# EAGLE board HV Board rev11 (EAGLE 9.2.2)
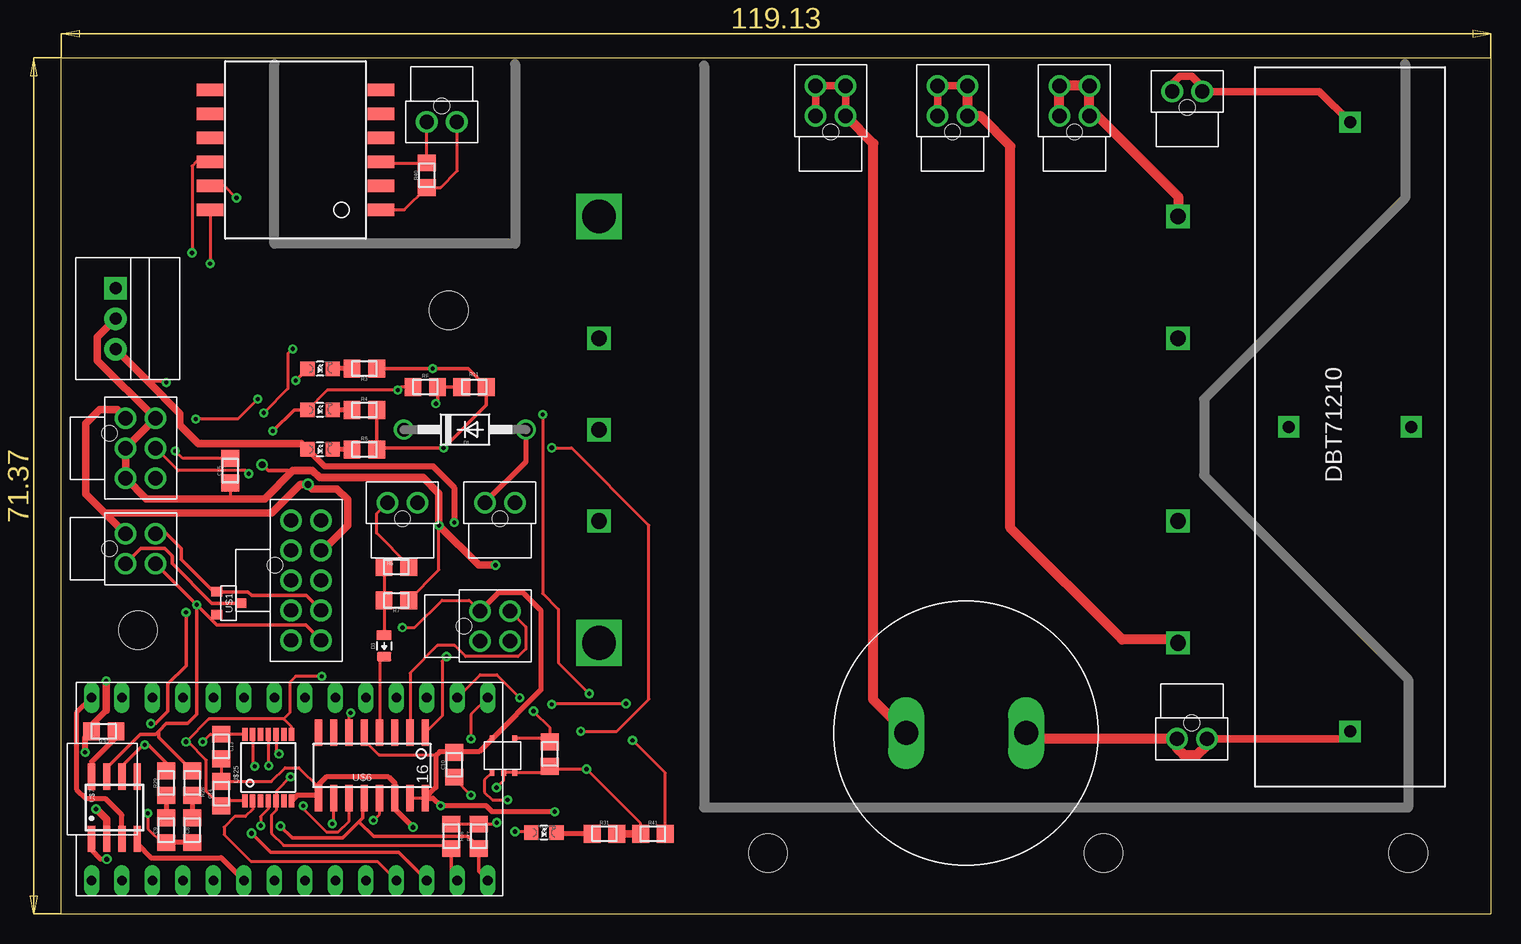
[diagram p0: board, top side]
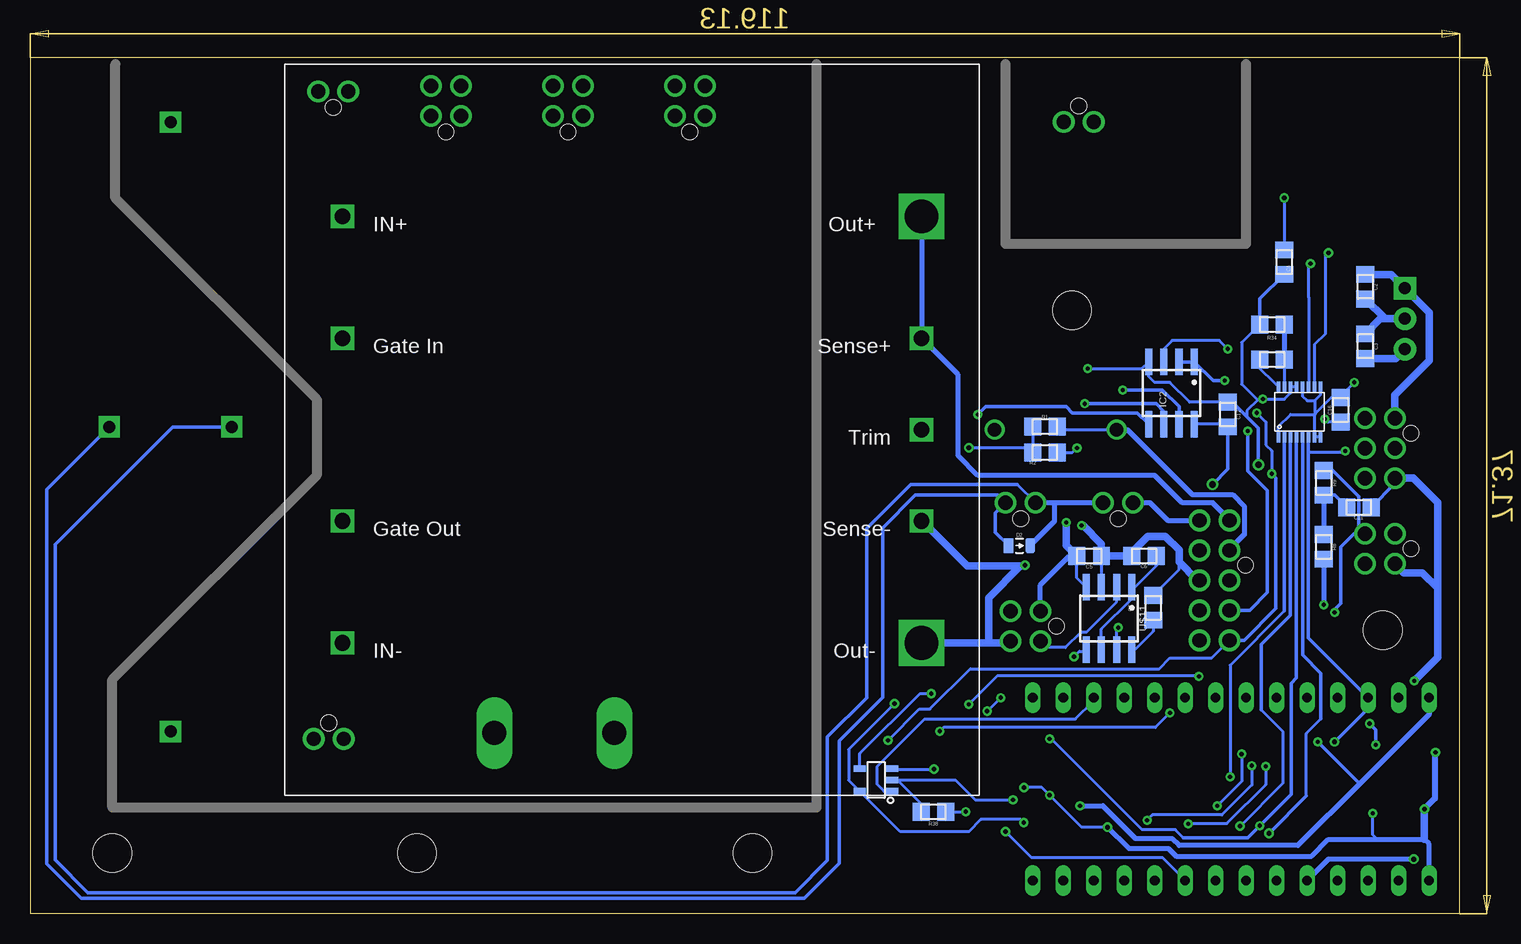
[diagram p1: board, bottom side, seen from below]

Size 119.13 x 71.37 mm. Coordinates in mm from the lower left corner, seen from the top.
Outline: 0,0 119.13,0 119.13,71.37 0,71.37 0,0
Copper layers (1*16): Top 0.035mm / dielectric 1.5mm / Bottom 0.035mm
Design rules "DRC Advanced Circuits": minimum track width 6mil, minimum drill 10mil, track to track 6mil, track to pad 6mil, pad to pad 6mil, via to via 6mil, smd to smd 6mil, copper to edge 40mil, drill to drill 6mil, minimum pad ring 10mil, minimum via ring 8mil, stop-mask expansion 4mil, vias tented up to drill 0mil, thermal gap 10mil
Net classes: 1 TS: clearance 8.5 mm to class 0; 2 ISO_SPI: clearance 8.5 mm to class 0, clearance 8.5 mm to class 1
Holes 3.2 mm at 86.87,5.08 6.4,23.67 112.27,5.08 58.93,5.08 32.31,50.34
tKeepout: area 29.3,47.3 to 35.3,53.3; area 3.4,20.7 to 9.4,26.7; area 55.9,2.1 to 61.9,8.1; area 83.9,2.1 to 89.9,8.1; area 109.3,2.1 to 115.3,8.1
bKeepout: area 109.3,2.1 to 115.3,8.1; area 83.9,2.1 to 89.9,8.1; area 55.9,2.1 to 61.9,8.1; area 3.4,20.7 to 9.4,26.7; area 29.3,47.3 to 35.3,53.3

## Footprints (pad centres in the part's own frame; a part is rotated, then mirrored left to right if it is on the bottom)
LED-805 = smd 1.2 x 1.2: A 0,-1.05; C 0,1.05
LLS2V221MELZ = drill 2 long: P$1 -5,0; P$2 5,0
0805 = smd 1.4 x 1.5: 1 -1.025,0; 2 1.025,0
NANO-FIT_VERTICAL-4 = drill 1.2: P$1 -1.25,0; P$2 1.25,0; P$3 -1.25,2.5; P$4 1.25,2.5 | hole 1.3: 0,-1.34
DO-41 = drill 1.118: A 5.08,0; C -5.08,0
0805_D = smd 0.8 x 1.2: A -0.9,0; C 0.9,0
NANO-FIT_VERTICAL-2 = drill 1.2: P$1 -1.25,0; P$2 1.25,0 | hole 1.3: 0,-1.34
OKI-78SR = drill 1 pad 1.88 square: 1 -2.54,0 | drill 1 pad 1.88: 2 0,0; 3 2.54,0
SOIC-08 = smd 0.6 x 2.2: 1 -1.905,-2.6; 2 -0.635,-2.6; 3 0.635,-2.6; 4 1.905,-2.6; 5 1.905,2.6; 6 0.635,2.6; 7 -0.635,2.6; 8 -1.905,2.6
NANO-FIT_VERTICAL-6 = drill 1.2: P$1 -2.5,0; P$2 0,0; P$3 2.5,0; P$4 -2.5,2.5; P$5 0,2.5; P$6 2.5,2.5 | hole 1.3: -1.25,-1.34
NANO-FIT_VERTICAL-10 = drill 1.2: P$1 -5,0; P$2 -2.5,0; P$3 0,0; P$4 2.5,0; P$5 5,0; P$6 -5,2.5; P$7 -2.5,2.5; P$8 0,2.5; P$9 2.5,2.5; P$10 5,2.5 | hole 1.3: -1.27,-1.34
SOT23 = smd 0.8 x 0.9: 1 -0.95,-1; 2 0.95,-1; 3 0,1
HM2102NLT = smd 1.067 x 2.184: P$1 0,0; P$2 2,0; P$3 4,0; P$4 6,0; P$5 8,0; P$6 10,0; P$7 10,14.25; P$8 8,14.25; P$9 6,14.25; P$10 4,14.25; P$11 2,14.25; P$12 0,14.25
SOT-23-5 = smd 1 x 0.55: 1 -1.35,0.95; 2 -1.35,0; 3 -1.35,-0.95; 4 1.35,-0.95; 5 1.35,0.95
DBT71210 = drill 1 pad 1.778 square: COIL+ 30,-13; COIL- 30,-2.8; CONTACT1 55.4,-7.9; CONTACT2 4.6,-7.9
HV_DCDC_VI-J71-CZ = drill 1.3 square: 1VIN+ 5.08,-12.7; 2GATEIN 5.08,-22.86; 3GATEOUT 5.08,-38.1; 4VIN- 5.08,-48.26; 6SENSE+ 53.34,-22.86; 7TRIM 53.34,-30.48; 8SENSE- 53.34,-38.1 | drill 2.8 square: 5VOUT+ 53.34,-12.7; 9VOUT- 53.34,-48.26
SOIC-16 = smd 0.6 x 2.2: 1 -4.445,-2.794; 2 -3.175,-2.794; 3 -1.905,-2.794; 4 -0.635,-2.794; 5 0.635,-2.794; 6 1.905,-2.794; 7 3.175,-2.794; 8 4.445,-2.794; 9 4.445,2.667; 10 3.175,2.667; 11 1.905,2.667; 12 0.635,2.667; 13 -0.635,2.667; 14 -1.905,2.667; 15 -3.175,2.667; 16 -4.445,2.667
MSOP-16 = smd 0.305 x 0.889: 1 -0.1,-0.5; 2 0.4,-0.5; 3 0.9,-0.5; 4 1.4,-0.5; 5 1.9,-0.5; 6 2.4,-0.5; 7 2.9,-0.5; 8 3.4,-0.5; 9 3.4,3.7; 10 2.9,3.7; 11 2.4,3.7; 12 1.9,3.7; 13 1.4,3.7; 14 0.9,3.7; 15 0.4,3.7; 16 -0.1,3.7
TEENSY_3.2_SIMPLE = drill 0.8 long: 3.3V 16.51,29.21; A0 16.51,3.81; A1 16.51,6.35; A2 16.51,8.89; A3 16.51,11.43; A4 16.51,13.97; A5 16.51,16.51; A6 16.51,19.05; A7 16.51,21.59; A8 16.51,24.13; A9 16.51,26.67; AGND 16.51,31.75; D0(RX1) 1.27,31.75; D1(TX1) 1.27,29.21; D2 1.27,26.67; D3(CANTX) 1.27,24.13; D4(CANRX) 1.27,21.59; D5 1.27,19.05; D6 1.27,16.51; D7(RX3) 1.27,13.97; D8(TX3) 1.27,11.43; D9(RX2) 1.27,8.89; D10(TX2) 1.27,6.35; D11 1.27,3.81; D12 1.27,1.27; D13 16.51,1.27; GND 1.27,34.29; VIN 16.51,34.29
SOT23-5 = smd 0.61 x 0.406: EN -2.794,0; GND -2.794,0.94; VCC 0,1.905; WDI 0,0; WDO -2.794,1.905
TSSOP-14 = smd 0.45 x 1.1: 1 -1.958,-2.618; 2 -1.308,-2.618; 3 -0.657,-2.618; 4 -0.007,-2.618; 5 0.642,-2.618; 6 1.292,-2.618; 7 1.942,-2.618; 8 1.942,2.918; 9 1.292,2.918; 10 0.642,2.918; 11 -0.007,2.918; 12 -0.657,2.918; 13 -1.308,2.918; 14 -1.958,2.918

## Placement (x,y rotation side)
BMS-OK  GREEN  [LED-805]  21.59,42.04 270 top
C1  180µF  [LLS2V221MELZ]  75.43,15.1 180 top
C2  10uF  [0805]  7.85,52.3 270 bottom
C3  10uF  [0805]  7.85,47.35 90 bottom
C4  27pF  [0805]  14.61,54.36 270 bottom
C5  0.1uF  [0805]  30.86,29.84 0 bottom
C6  0.1uF  [0805]  26.29,29.84 180 bottom
C7  530pF  [0805]  25.53,25.53 90 bottom
C8  560pF  [0805]  10.92,6.99 90 top
C9  560pF  [0805]  8.76,6.99 90 top
C10  0.1uF  [0805]  32.77,12.45 270 top
C11  4.7nF  [0805]  8.38,33.91 180 bottom
C12  0.1uF  [0805]  19.3,41.66 90 bottom
C13  0.1uF  [0805]  13.34,13.97 270 top
C14  0.1uF  [0805]  13.34,10.03 90 top
C15  0.1uF  [0805]  14.1,36.96 90 top
C16  0.1uF  [0805]  9.91,42.04 90 bottom
CURRENT  CURRENT  [NANO-FIT_VERTICAL-4]  34.92,24 270 top
D1  DIODE  [DO-41]  33.66,40.39 0 top
D2  TS4148 RYG  [0805_D]  36.68,30.71 0 bottom
D3  TS4148 RYG  [0805_D]  26.92,22.35 270 top
DISCH+  DISCHARGE+  [NANO-FIT_VERTICAL-2]  93.85,68.58 0 top
HV+FUSED_1A-IMD+  HV+  [NANO-FIT_VERTICAL-4]  84.45,66.55 0 top
HV+UNFUSED  HV+UNFUSED  [NANO-FIT_VERTICAL-2]  94.23,14.61 180 top
HV-FUSED_1A-IMD-  HV-  [NANO-FIT_VERTICAL-4]  74.3,66.55 0 top
HV-UNFUSED_DISCHARGE-  HV-UNFUSED  [NANO-FIT_VERTICAL-4]  64.14,66.55 0 top
IC1  OKI-78SR-5  [OKI-78SR]  4.55,49.63 270 top
IC2  NE5532SOIC  [SOIC-08]  24,43.43 180 bottom
IMD  CONNECTOR-6NANO-FIT_VERTICAL-6  [NANO-FIT_VERTICAL-6]  5.38,38.84 270 top
IMD-OK  YELLOW  [LED-805]  21.59,45.47 270 top
INTERLOCK  INTERLOCK  [NANO-FIT_VERTICAL-2]  28.45,34.29 0 top
ISO_SPI  ISO_SPI  [NANO-FIT_VERTICAL-2]  31.73,66.04 180 top
LED  BLUE  [LED-805]  40.23,6.78 270 top
MAIN  MAIN  [NANO-FIT_VERTICAL-10]  19.18,27.81 270 top
ON-LED  PURPLE  [LED-805]  21.59,38.73 270 top
POWER  POWER  [NANO-FIT_VERTICAL-4]  5.38,30.45 270 top
R1  43k  [0805]  34.54,40.64 180 bottom
R2  12k  [0805]  34.54,38.48 180 bottom
R3  820  [0805]  25.27,45.47 180 top
R4  2k  [0805]  25.27,42.04 0 top
R5  270  [0805]  25.27,38.73 0 top
R6  43k  [0805]  27.94,28.96 180 top
R7  12k  [0805]  27.94,26.16 180 top
R8  60  [0805]  11.3,30.61 270 bottom
R9  60  [0805]  11.3,35.94 90 bottom
R11  1k  [0805]  34.42,43.94 180 top
R28  100  [0805]  10.92,10.92 90 top
R29  100  [0805]  8.76,10.92 90 top
R30  1k  [0805]  3.56,15.24 0 top
R31  43  [0805]  45.29,6.71 0 top
R33  1k  [0805]  15.62,46.23 0 bottom
R34  1k  [0805]  15.62,49.15 180 bottom
R36  2k  [0805]  32.51,6.48 270 top
R37  2k  [0805]  34.8,6.48 270 top
R38  430  [0805]  43.84,8.51 180 bottom
R40  100  [0805]  30.48,61.59 90 top
R41  2k  [0805]  49.33,6.68 180 top
R42  10k  [0805]  40.74,13.34 270 top
RELAYS  RELAYS  [NANO-FIT_VERTICAL-2]  36.58,34.29 0 top
RF  2k  [0805]  30.35,43.94 180 top
U$1  CDSOT23-T24CAN-Q  [SOT23]  13.97,25.91 270 top
U$2  HM2102NLT  [HM2102NLT]  26.67,58.71 90 top
U$3  SN74LVC1G08  [SOT-23-5]  48.62,11.18 180 bottom
U$4  [DBT71210]  115.32,70.61 270 top
U$5  HV_DCDC_VI-J71-CZ  [HV_DCDC_VI-J71-CZ]  98.17,70.87 0 bottom
U$6  MCP3208SOIC  [SOIC-16]  25.91,12.32 180 top
U$7  MCP2551  [SOIC-08]  4.45,8.86 0 top
U$8  LTC6820  [MSOP-16]  14.99,40.26 0 bottom
U$9  TEENSY_3.2_SIMPLE  [TEENSY_3.2_SIMPLE]  36.83,1.52 90 top
U$10  STWD100  [SOT23-5]  37.82,14.61 90 top
U$11  MAX7480  [SOIC-08]  29.21,24.64 180 bottom
U$25  TXB0104TSSOP  [TSSOP-14]  17.27,12.06 0 top

## Library data of the parts
BMS-OK C1-C16 CURRENT D1-D3 DISCH+ HV+FUSED_1A-IMD+ HV+UNFUSED HV-FUSED_1A-IMD- HV-UNFUSED_DISCHARGE- IC1 IC2 IMD IMD-OK INTERLOCK ISO_SPI LED MAIN ON-LED POWER R1-R9 R11 R28-R31 R33 R34 R36-R38 R40-R42 RELAYS RF U$1-U$11 U$25 = HyTechDevices

## Nets
+3V3: C14.1 C15.2 R36.1 R37.1 U$3.5 U$8.6 U$9.3.3V U$25.1 U$25.8
+5V: C3.1 C5.1 C10.1 C13.1 C16.2 CURRENT.P$1 IC1.3 ON-LED.A R38.1 U$6.5 U$6.15 U$6.16 U$7.3 U$8.1 U$8.7 U$8.8 U$8.9 U$8.12 U$9.VIN U$10.VCC U$11.4 U$11.7 U$25.14
+12V: C2.1 C12.1 IC1.1 IC2.8 IMD.P$1 MAIN.P$7 POWER.P$1
BMS_OK_3.3V: IC2.5 U$3.4
BMS_OK_10V: BMS-OK.A IC2.7 MAIN.P$4 RF.2
CANH: MAIN.P$10 POWER.P$4 R8.2 R28.2 U$1.2 U$7.7
CANL: MAIN.P$9 POWER.P$3 R9.2 R29.2 U$1.1 U$7.6
CHARGE_ENABLE: D1.C MAIN.P$2 R1.1
CS_LTC6820: U$8.5 U$9.D10(TX2)
CS_MCP3208_3.3V: U$9.D9(RX2) U$25.2
CUR_SENSE: CURRENT.P$2 U$11.2
DISCHARGE_RELAY_GND: D2.A RELAYS.P$2 U$4.COIL-
GND: C2.2 C3.2 C4.2 C5.2 C6.2 C7.2 C8.1 C9.1 C10.2 C11.1 C12.2 C13.2 C14.2 C15.1 C16.1 CURRENT.P$4 IC1.2 IC2.4 IMD.P$2 IMD.P$3 IMD.P$4 MAIN.P$8 POWER.P$2 R2.1 R3.1 R4.2 R5.2 R7.1 R11.1 R30.1 R31.2 R34.2 R41.2 R42.2 U$1.3 U$3.3 U$5.8SENSE- U$5.9VOUT- U$6.9 U$6.14 U$7.2 U$8.13 U$8.14 U$9.GND U$10.EN U$10.GND U$11.3 U$25.7
HV+FUSED_1A [TS]: HV+FUSED_1A-IMD+.P$1 HV+FUSED_1A-IMD+.P$2 HV+FUSED_1A-IMD+.P$3 HV+FUSED_1A-IMD+.P$4 U$5.1VIN+
HV+UNFUSED [TS]: C1.P$1 HV+UNFUSED.P$1 HV+UNFUSED.P$2 U$4.CONTACT1
HV+UNFUSED_FSAE_DISCHARGE [TS]: DISCH+.P$1 DISCH+.P$2 U$4.CONTACT2
HV-FUSED_1A [TS]: HV-FUSED_1A-IMD-.P$1 HV-FUSED_1A-IMD-.P$2 HV-FUSED_1A-IMD-.P$3 HV-FUSED_1A-IMD-.P$4 U$5.4VIN-
HV-UNFUSED [TS]: C1.P$2 HV-UNFUSED_DISCHARGE-.P$1 HV-UNFUSED_DISCHARGE-.P$2 HV-UNFUSED_DISCHARGE-.P$3 HV-UNFUSED_DISCHARGE-.P$4
IM: U$2.P$10 U$8.10
IP: U$2.P$12 U$8.11
ISOSPI-M [ISO_SPI]: ISO_SPI.P$2 R40.2 U$2.P$3
ISOSPI-P [ISO_SPI]: ISO_SPI.P$1 R40.1 U$2.P$1
MISO: R37.2 U$6.12 U$8.3 U$9.D12
MOSI_5V: U$6.11 U$25.10
MOSI_TEENSY: R36.2 U$8.2 U$9.D11 U$25.5
N$1: U$6.1 U$11.5
N$2: C6.1 U$11.1 U$11.6
N$3: ON-LED.C R5.1
N$4: C7.1 U$11.8
N$7: U$6.10 U$25.13
N$9: D3.A R6.2 R7.2
N$10: D3.C U$6.4
N$11: C11.2 R8.1 R9.1
N$12: IC2.6 R11.2 RF.1
N$24: R1.2 R2.2 U$6.6
N$25: U$7.1 U$9.D3(CANTX)
N$26: R30.2 U$7.8
N$27: C8.2 R28.1
N$28: C9.2 R29.1
N$29: LED.C R31.1
N$31: R33.1 U$8.16
N$32: R33.2 R34.1 U$8.15
N$35: C4.1 U$2.P$11
N$36: U$7.4 U$9.D4(CANRX)
N$37: LED.A U$9.D7(RX3)
N$38: R38.2 U$3.2 U$10.WDO
N$40: U$3.1 U$9.A1
N$42: IC2.1 IC2.2 IMD-OK.A
N$44: BMS-OK.C R4.1
N$45: IMD-OK.C R3.2
N$50: R42.1 U$9.A0 U$10.WDI
OKHS: IC2.3 IMD.P$5 MAIN.P$5 R41.1
SCK_5V: U$6.13 U$25.11
SCK_TEENSY: U$8.4 U$9.D13 U$25.4
SHUTDOWN_G: INTERLOCK.P$1 MAIN.P$6 R6.1
SHUTDOWN_H: D1.A D2.C INTERLOCK.P$2 RELAYS.P$1 U$4.COIL+
TEMP_SENSE: CURRENT.P$3 U$6.2
TSAL+: MAIN.P$1 U$5.5VOUT+ U$5.6SENSE+

## Tracks (layer width: path | path; a pad name or v marks a point on that pad's centre or on a via)
+3V3  (via drill 0.35, 0.38)
  Top 0.254: v47.09,17.53 40.95,17.53 v40.89,17.48 | U$25.8 19.21,15.58 18.54,16.26 | 18.54,16.26 12.32,16.26 v10.41,14.35 10.59,14.35 12.11,12.83 12.11,10.23 C14.1 13.77,9.45 U$25.1 | v21.72,19.81 19.56,19.81 19.05,19.3 19.05,16.76 18.54,16.26 | C15.2 10.15,37.98 v9.53,38.61 | R36.1 R37.1 36.2,7.5 v36.32,7.62
  Bottom 0.254: v47.09,17.53 50.9,13.72 50.9,11.16 U$3.5 46.6,6.86 40.89,6.86 39.88,7.87 36.58,7.87 v36.32,7.62 | v40.89,17.48 38.49,19.88 21.78,19.88 v21.72,19.81 | v9.53,38.61 9.65,38.48 12.59,38.48
  Bottom 0.305: v10.41,14.35 7.62,17.14 U$9.3.3V 12.59,23 12.59,38.48 U$8.6
+5V  (via drill 0.35)
  Top 0.254: U$25.14 15.3,14.99 C13.1 12.46,14.99 v11.81,14.35 | C10.1 32.2,13.47 32.13,13.54 | U$6.5 25.27,14.48 26.48,13.27 31.18,13.27 31.23,13.22 31.24,13.21 31.24,13.11 | U$6.16 U$6.15 | 7.21,44.42 8.66,44.42 v8.76,44.32 | v28.45,23.88 29.46,23.88 31.75,26.16 34.02,26.16 CURRENT.P$1
  Top 0.406: U$7.3 5.08,8.26 3.74,9.59 2.09,9.59 1.27,10.41 1.27,16.76 U$9.VIN | 31.24,13.11 31.24,10.54 U$6.16 31,9.65 v31.63,9.02 35.43,9.02 35.92,8.53 v41.15,8.53 | 31.23,13.22 31.55,13.54 32.13,13.54 34.85,13.54 U$10.VCC 39.98,18.67 39.98,25.3 38.48,26.8 36.47,26.8 CURRENT.P$1
  Top 0.508: ON-LED.A 21.94,37.34 30.99,37.34 32.77,35.56 v32.77,32.64
  Top 0.61: IC1.3 7.21,44.42 9.91,41.73 9.91,40.77 11.43,39.24 20.03,39.24 ON-LED.A
  Bottom 0.254: U$8.8 U$8.7 12.06,39.78 12.06,41.66 | 12.06,42.8 12.06,41.66 12.01,41.72 | U$11.4 31.89,28.01 C5.1 | U$8.9 11.59,43.28 12.06,42.8 | U$8.12 13.09,43.19 12.7,42.8 12.06,42.8 | U$8.1 15.09,40.64 14.07,41.66 12.06,41.66 | R38.1 41.17,8.51 v41.15,8.53 | v8.76,44.32 9.91,43.18 C16.2 10.67,43.06 12.01,41.72 | 12.01,41.72 12.06,41.66 | U$11.7 28.57,23.75 v28.45,23.88
  Bottom 0.305: v11.81,14.35 8.32,10.86
  Bottom 0.406: C5.1 32.51,29.84 34.92,27.43 CURRENT.P$1 | U$9.VIN 2.54,16.64 8.32,10.86 13.46,5.71 23.37,5.71 23.94,6.29 26.99,6.29 29.72,9.02 v31.63,9.02
  Bottom 0.61: IC1.3 5.32,46.32 C3.1 | C5.1 32.77,30.73 v32.77,32.64
+12V  (via drill 0.55)
  Top 0.61: MAIN.P$7 21.8,30.31 23.88,32.38 23.88,34.54 22.99,35.43 20.95,35.43 v20.57,35.81 19.94,35.81 17.58,33.45 17.27,33.45 3.64,33.45 | POWER.P$1 3.64,33.45 | 3.64,33.45 2.07,35.02 2.07,40.9 3.23,42.06 4.66,42.06 IMD.P$1
  Bottom 0.254: C12.1 19.51,40.83 IC2.8
  Bottom 0.305: C12.1 19.3,37.08 v20.57,35.81
  Bottom 0.61: C2.1 5.7,53.32 IC1.1 2.52,50.14 2.52,46.15 5.38,43.28 IMD.P$1
BMS_OK_3.3V  (via drill 0.35)
  Top 0.254: v44.03,18.37 41.45,20.95 41.45,25.4 40.13,26.72 v40.13,41.66
  Bottom 0.254: U$3.4 49.97,13.38 44.98,18.37 v44.03,18.37
  Bottom 0.305: IC2.5 26.86,41.78 32.26,41.78 32.77,42.29 39.5,42.29 v40.13,41.66
BMS_OK_10V  (via drill 0.35)
  Top 0.254: BMS-OK.A 22.19,43.69 v28.07,43.69 28.32,43.94 RF.2
  Top 0.305: v17.65,40.26 19.43,42.04 BMS-OK.A
  Bottom 0.305: MAIN.P$4 17.49,25.31 16,26.8 16,35.29 17.65,36.94 v17.65,40.26 | IC2.7 23.37,42.29 24.77,43.69 v28.07,43.69
CANH  (via drill 0.35)
  Top 0.305: MAIN.P$10 20.38,24.11 12.98,24.11 12.51,24.58 | POWER.P$4 v11.31,25.78 | v11.31,25.78 12.51,24.58 | 3.81,12.19 6.6,14.99 7.87,14.99 8.13,15.24 | R28.2 8.13,14.74 8.13,15.24 | v11.31,25.78 11.31,16.64 10.54,15.88 8.76,15.88 8.13,15.24 | U$1.2 12.59,24.58 12.51,24.58
  Top 0.406: 3.81,12.19 U$7.7
  Bottom 0.406: R8.2 v11.3,25.79 v11.31,25.78
CANL  (via drill 0.35)
  Top 0.305: MAIN.P$9 20.45,26.54 15.88,26.54 15.56,26.86 U$1.1 12.73,26.86 10.03,29.56 10.03,30.48 8.81,31.7 POWER.P$3 | R29.2 8.76,12.58 7.25,14.1 v6.99,14.1 6.86,14.1 5.08,12.32 U$7.6 | v10.41,25.15 10.41,20.7 8.89,19.18 8.89,16.89 7.87,15.88 v7.49,15.88
  Bottom 0.305: v10.41,25.15 10.41,25.4 9.91,25.91 9.91,30.61 8.81,31.7 POWER.P$3 8.38,32.2 8.38,34.79 10.55,36.97 R9.2 | v7.49,15.88 6.99,15.37 v6.99,14.1
CHARGE_ENABLE
  Bottom 0.254: R1.1 33.27,40.39 D1.C
  Bottom 0.406: D1.C 27.69,40.39 22.26,34.96 18.91,34.96 17.92,33.97 17.92,31.64 19.21,30.35 MAIN.P$2
CS_LTC6820  (via drill 0.4)
  Top 0.305: v15.88,6.73 17.46,5.14 28.13,5.14 U$9.D10(TX2)
  Bottom 0.254: 12.76,9.84 12.76,15.05 11.56,16.26
  Bottom 0.305: v15.88,6.73 12.76,9.84 | 11.56,16.26 11.56,20.07 13.08,21.59 U$8.5
CS_MCP3208_3.3V
  Top 0.254: U$9.D9(RX2) 26.35,4.38 15.81,4.38 13.59,6.6 13.59,7.24 14.48,8.13 15.37,8.13 15.96,8.73 U$25.2
CUR_SENSE
  Bottom 0.254: CURRENT.P$2 34.87,22.75 34.33,22.21 32.84,22.21 31.56,23.5 31.11,23.5 28.57,26.04 28.57,26.98 U$11.2
DISCHARGE_RELAY_GND
  Bottom 0.305: U$4.COIL- 117.73,35.4 117.73,4.19 114.84,1.3 54.6,1.3 51.69,4.22 51.69,14.42 48.06,18.05 48.06,32.2 45.34,34.92 38.46,34.92 RELAYS.P$2 38.68,33.43 38.68,31.82 D2.A
GND  (via drill 0.35, 0.38, 0.4, 0.55)
  Top 0.254: R41.2 48.3,7.55 v43.79,12.06 40.99,12.06 R42.2 40.24,11.81 U$10.EN U$10.GND 36.88,11.12 v36.3,10.54 | v7.24,8.38 7.24,7.1 8.51,5.83 | 21.46,10.54 19.81,12.19 18.67,12.19 17.54,11.06 C14.2 C13.2 | C10.2 32.77,11.3 v34.16,9.91 | v31.5,32.38 31.5,28.69 R7.1 | C15.1 14.1,34.62 | v16.38,42.93 14.73,41.27 v11.23,41.27
  Top 0.305: 8.51,5.83 9.14,5.83 | POWER.P$2 6.66,30.48 8.64,30.48 9.27,29.84 9.27,29.21 12.57,25.91 U$1.3 | R4.2 R5.2 26.43,38.86 v31.88,38.86 35.44,42.43 R11.1 33.92,45.47 v30.99,45.47 R3.1 | v16.76,37.47 17.27,36.96 19.3,36.96
  Top 0.406: C9.1 9.27,5.96 | C8.1 9.27,5.96 | 9.14,5.83 9.27,5.96 | v29.34,7.24 27.81,8.76 U$6.14 27.81,10.92 27.3,11.43 22.1,11.43 21.46,10.79 21.46,10.54 U$6.9 21.21,9.91 19.67,9.91 U$25.7
  Top 0.508: 3.78,16.99 2.53,15.74 R30.1 2,14.71 v2,13.48
  Top 0.61: 3.78,16.99 v3.78,19.43 | U$7.2 3.81,7.87 v2.92,8.76 | R41.2 48.28,6.71 R31.2 | IC1.2 3.02,48.11 3.02,46.15 7.84,41.34 IMD.P$4 IMD.P$2 IMD.P$3 7.1,34.62 14.1,34.62 16.97,34.62 19.3,36.96 20.95,36.96 21.54,36.37 30.18,36.37 31.5,35.05 v31.5,32.38 34.8,29.08 v36.2,29.08
  Bottom 0.254: U$8.13 U$8.14 14.09,43.43 14.59,42.93 v16.38,42.93 16.76,42.93 16.83,42.86 | U$3.3 47.2,12.06 v43.79,12.06 | R2.1 32.26,38.48 v31.88,38.86 | R34.2 18.15,47.65 18.15,44.18 16.83,42.86 | 6.86,6.22 7.24,6.61 v7.24,8.38 | v36.3,10.54 34.8,10.54 v34.16,9.91 31.5,7.24 v29.34,7.24 | C7.2 23.37,28.71 23.37,29.34 | C5.2 29.84,27.25 U$11.3 | C12.2 22.49,42.68 24.13,44.32 25.4,44.32 25.91,44.83 IC2.4 26.48,45.47 v30.99,45.47 | 16.83,42.86 17.72,41.97 17.72,41.47 | C16.1 10.96,41.01 v11.23,41.27
  Bottom 0.305: C4.2 16.65,51.29 R34.2 | C11.1 5.38,35.88 IMD.P$3 | C12.2 18.93,42.68 17.72,41.47 16.76,40.51 v16.76,37.47
  Bottom 0.406: v29.34,7.24 27.56,5.46 24.26,5.46 23.62,4.83 12.32,4.83 10.92,6.22 6.86,6.22 2.92,6.22 2.54,5.84 U$9.GND
  Bottom 0.508: v2,13.48 2.06,13.43 2.06,9.63 v2.92,8.76
  Bottom 0.61: 36.6,29.01 41.01,29.01 44.77,32.77 U$5.8SENSE- | U$5.9VOUT- 39.24,22.61 | 39.24,22.61 37.57,22.61 CURRENT.P$4 | 39.24,22.61 39.24,26.36 36.6,29.01 | MAIN.P$8 21.84,27.81 23.37,29.34 23.37,30.35 24.51,31.5 25.96,31.5 27.31,30.15 C6.2 C5.2 29.84,30.85 31.37,32.38 v31.5,32.38 | IMD.P$3 3.86,36.34 1.83,34.3 1.83,27.18 | v2.92,8.76 2.92,6.22 | C2.2 6.21,49.63 | 6.21,49.63 IC1.2 | C3.2 6.59,49.63 6.21,49.63 | v3.78,19.43 1.83,21.38 1.83,27.18 | POWER.P$2 4.63,28.45 3.1,28.45 1.83,27.18 | 36.6,29.01 36.27,29.01 v36.2,29.08
HV+FUSED_1A
  Top 0.813: HV+FUSED_1A-IMD+.P$1 HV+FUSED_1A-IMD+.P$3 HV+FUSED_1A-IMD+.P$4 HV+FUSED_1A-IMD+.P$2 86.36,66.55 93.09,59.82 U$5.1VIN+
HV+UNFUSED
  Top 0.61: HV+UNFUSED.P$1 106.81,14.61 U$4.CONTACT1
  Top 0.813: C1.P$1 80.92,14.61 HV+UNFUSED.P$2 92.98,13.82 93.6,13.21 94.61,13.21 95.48,14.08 HV+UNFUSED.P$1
HV+UNFUSED_FSAE_DISCHARGE
  Top 0.61: DISCH+.P$1 92.6,69.23 93.22,69.85 94.23,69.85 95.1,68.98 DISCH+.P$2 104.85,68.58 U$4.CONTACT2
HV-FUSED_1A
  Top 0.61: HV-FUSED_1A-IMD-.P$1 HV-FUSED_1A-IMD-.P$3 HV-FUSED_1A-IMD-.P$4
  Top 0.813: U$5.4VIN- 92.81,22.89 88.43,22.89 79.12,32.19 79.12,64.01 76.58,66.55 HV-FUSED_1A-IMD-.P$2 HV-FUSED_1A-IMD-.P$4
HV-UNFUSED
  Top 0.61: HV-UNFUSED_DISCHARGE-.P$1 HV-UNFUSED_DISCHARGE-.P$3 HV-UNFUSED_DISCHARGE-.P$4 HV-UNFUSED_DISCHARGE-.P$2
  Top 0.813: C1.P$2 67.69,17.83 67.69,64.24 HV-UNFUSED_DISCHARGE-.P$2
IM  (via drill 0.38)
  Top 0.254: v10.92,55.12 10.92,62.36 11.27,62.71 U$2.P$10
  Bottom 0.254: v10.92,55.12 11.18,54.86 11.18,48.41 11.17,48.4 12.09,47.48 U$8.10
IP  (via drill 0.35)
  Top 0.254: U$2.P$12 v12.42,54.23
  Bottom 0.254: U$8.11 12.58,51.44 12.58,54.07 v12.42,54.23
ISOSPI-M
  Top 0.254: ISO_SPI.P$2 R40.2 26.76,62.62 U$2.P$3
ISOSPI-P
  Top 0.254: ISO_SPI.P$1 33.02,66 33.02,61.97 31.62,60.57 R40.1 28.62,58.71 U$2.P$1
MISO  (via drill 0.38)
  Top 0.254: 25.27,9.53 U$6.12
  Top 0.305: 24.83,7.68 23.5,6.35 19.27,6.35 v18.29,7.33 | 24.83,7.68 25.15,8 25.15,9.4 25.27,9.53 | 24.83,7.68 26.05,6.46 33.9,6.46 34.8,5.55 R37.2 34.8,3.56 U$9.D12
  Bottom 0.254: v18.29,7.33 14.73,10.88 14.73,15.24 16.51,17.02
  Bottom 0.305: U$8.3 14.09,24.9 16.51,22.48 16.51,17.02
MOSI_5V  (via drill 0.35)
  Top 0.254: U$25.10 17.91,13.58 v18.16,13.34 | U$6.11 24,7.75 23.11,6.86 22.1,6.86 20.19,8.76 v20.19,9.02
  Bottom 0.254: v18.16,13.34 18.16,11.05 v20.19,9.02
MOSI_TEENSY  (via drill 0.35)
  Top 0.254: R36.2 32.25,5.71 18.54,5.71 17.53,6.73 17.53,8.25 17.91,8.64 U$25.5 17.91,10.22 v19.12,11.43
  Top 0.305: U$9.D11 32.51,3.3 R36.2
  Bottom 0.254: 14.59,25.27 19.12,20.74 v19.12,11.43
  Bottom 0.305: U$8.2 14.59,25.27
N$1  (via drill 0.38)
  Top 0.254: U$6.1 31.75,16.51 31.75,21.08 v32.13,21.46
  Bottom 0.254: v32.13,21.46 31.68,21.91 31.24,21.91 U$11.5
N$2
  Bottom 0.254: C6.1 25.26,29.02 27.05,27.24 U$11.1 27.3,26.29 29.84,23.75 U$11.6
N$3
  Top 0.406: R5.1 ON-LED.C
N$4
  Bottom 0.254: C7.1 25.53,23.56 27.05,22.04 U$11.8
N$7  (via drill 0.35)
  Top 0.254: U$25.13 15.96,12.51 v16.15,12.32 | v22.61,7.52 22.73,7.64 U$6.10
  Bottom 0.254: v16.15,12.32 16.15,10.77 19.38,7.54 22.58,7.54 v22.61,7.52
N$9
  Top 0.254: R6.2 R7.2 D3.A
N$10
  Top 0.254: D3.C 26.54,21.07 U$6.4
N$11
  Bottom 0.305: C11.2 10.41,34.92 R9.1
  Bottom 0.406: R9.1 R8.1
N$12  (via drill 0.35)
  Top 0.305: R11.2 RF.1 31.38,42.68 v31.24,42.55
  Bottom 0.305: v31.24,42.55 25.27,42.55 24.64,41.91 IC2.6
N$24  (via drill 0.35, 0.38)
  Top 0.254: v40.89,38.86 42.55,38.86 49,32.41 49,17.91 46.33,15.24 v43.31,15.24 | U$6.6 24,16.64 v24.13,16.76
  Bottom 0.254: R1.2 R2.2 35.95,38.86 v40.89,38.86 | v24.13,16.76 25.34,15.56 42.99,15.56 v43.31,15.24
N$25  (via drill 0.4)
  Top 0.406: U$7.1 2.54,5.33 3.3,4.57 v3.81,4.57
  Bottom 0.406: v3.81,4.57 10.92,4.57 U$9.D3(CANTX)
N$26
  Top 0.406: R30.2 4.58,14.73 2.54,12.69 U$7.8
N$27
  Top 0.406: R28.1 C8.2
N$28
  Top 0.406: R29.1 C9.2
N$29
  Top 0.406: R31.1 41.36,6.71 LED.C
N$31
  Bottom 0.254: U$8.16 15.11,43.96 17.01,45.86 R33.1
N$32
  Bottom 0.254: U$8.15 14.61,43.94 R33.2
  Bottom 0.406: R34.1 R33.2
N$35  (via drill 0.38)
  Top 0.254: v14.61,59.69 13.59,60.71 U$2.P$11
  Bottom 0.254: v14.61,59.69 C4.1
N$36
  Top 0.406: U$9.D4(CANRX) 13.34,4.7 7.49,4.7 6.35,5.84 U$7.4
N$37  (via drill 0.38)
  Top 0.254: LED.A 39.11,6.86 v37.82,6.86
  Bottom 0.254: U$9.D7(RX3) 24.79,4.72 35.69,4.72 v37.82,6.86
N$38  (via drill 0.35)
  Top 0.254: U$10.WDO 35.28,11.18 35.28,10.16 35.92,9.53 v37.21,9.53
  Bottom 0.254: v37.21,9.53 40.36,9.53 42.01,11.18 U$3.2 46.86,11.18 44.87,9.18 R38.2
N$40
  Bottom 0.254: U$9.A1 30.48,17.78 32,16.26 44.58,16.26 48.51,12.32 48.51,10.79 47.95,10.23 U$3.1
N$42  (via drill 0.35)
  Top 0.305: IMD-OK.A v19.56,44.48
  Bottom 0.305: v19.56,44.48 20.54,44.48 IC2.1 IC2.2
N$44
  Top 0.406: R4.1 BMS-OK.C
N$45
  Top 0.406: R3.2 IMD-OK.C
N$50  (via drill 0.35)
  Top 0.254: U$10.WDI 37.77,14.66 40.45,14.66 | U$9.A0 34.92,19.94 36.32,19.94 v38.23,18.03 | v39.37,16.91 40.74,15.54 R42.1
  Top 0.305: R42.1 40.45,14.66
  Bottom 0.254: v38.23,18.03 38.25,18.03 v39.37,16.91
OKHS  (via drill 0.35)
  Top 0.254: v15.65,36.7 15.4,36.96 9.76,36.96 IMD.P$5 | v47.62,14.48 50.35,11.75 R41.1 | v19.3,47.12 18.9,46.71 18.9,43.79 v16.89,41.78
  Bottom 0.254: MAIN.P$5 20.65,21.34 24.13,21.34 25.02,20.45 40.77,20.45 44.13,17.08 45.02,17.08 v47.62,14.48 | v19.3,47.12 20,47.82 23.94,47.82 24.64,47.12 IC2.3 | v16.89,41.78 16.13,41.02 16.13,39.12 15.65,38.64 v15.65,36.7
  Bottom 0.305: MAIN.P$5 17.95,22.81 15.3,25.46 15.3,36.36 v15.65,36.7
SCK_5V  (via drill 0.35)
  Top 0.254: U$25.11 17.27,12.41 v17.31,12.37 | v26.04,7.81 26.54,8.32 U$6.13
  Bottom 0.254: v26.04,7.81 25.59,8.26 19.81,8.26 17.31,10.76 v17.31,12.37
SCK_TEENSY  (via drill 0.35)
  Top 0.254: U$25.4 17.27,8.76 16.64,8.13 v16.64,7.37 | U$9.D13 34.16,16.64 v34.16,14.61
  Bottom 0.254: 23.01,6.35 23.69,7.02 26.45,7.02 34.04,14.61 v34.16,14.61
  Bottom 0.305: U$8.4 13.59,39.38 13.59,19.68 14.03,19.24 14.03,9.97 v16.64,7.37 17.65,6.35 23.01,6.35
SHUTDOWN_G
  Top 0.254: INTERLOCK.P$1 26.29,33.38 26.29,31.75 28.96,29.07 R6.1
  Bottom 0.406: INTERLOCK.P$1 25.8,34.29 24.32,32.81 MAIN.P$6
SHUTDOWN_H
  Top 0.406: RELAYS.P$1 38.73,37.7 D1.A
  Bottom 0.254: 36.85,35.81 RELAYS.P$1
  Bottom 0.305: U$4.COIL+ 107.22,40.61 117.03,30.8 117.03,4.51 114.3,1.78 55.37,1.78 52.68,4.47 52.68,14.76 49.4,18.03 49.4,32.13 45.72,35.81 36.85,35.81
  Bottom 0.406: RELAYS.P$1 33.73,34.29 | 33.73,34.29 INTERLOCK.P$2 | D2.C 33.73,32.76 33.73,34.29
TEMP_SENSE
  Top 0.254: CURRENT.P$3 38.73,23.94 38.73,22.1 38.1,21.46 33.72,21.46 32.79,22.39 31.37,22.39 29.08,20.1 U$6.2
TSAL+
  Bottom 0.406: MAIN.P$1 19.18,32.89 20.56,34.27 23.1,34.27 25.4,36.58 30.86,36.58 40.13,36.58 41.78,38.23 41.78,44.96 U$5.6SENSE+ U$5.5VOUT+

## Text on the board
tDocu: TS | GLV | GLV | TS | isoSPI | GLV | GLV | isoSPI | UNFUSED- | FUSED- | FUSED+ | DISCHARGE- | IMD- | IMD+ | isoSPI | GLV | DANGER / HIGH VOLTAGE | TS | GLV | GLV | TS | TS | GLV | IMD | GLV | GLV | TS | TS | TRACTIVE SYSTEM / PCB AREA | TS | GLV | STWD100 | UNFUSED+ | TEENSY | Grounded Low / Voltage PCB Area | 2019 HV_board_rev11 / Designed by Yvonne Yeh
bDocu: TS | GLV | GLV | TS | isoSPI | GLV | GLV | isoSPI | isoSPI | GLV | DANGER / HIGH VOLTAGE | TS | GLV | GLV | TS | TS | GLV | LTC6820 | GLV | GLV | TS | TS | TRACTIVE SYSTEM / PCB AREA | TS | GLV | SN74LVC1G08 | Grounded Low / Voltage PCB Area
200bmp: C:/Users/yyeh8/Documents/GitHub/circuits-2019/EAGLE Supporting Files/Bitmaps for logos/HyTech_square.bmp | C:/Users/yyeh8/Documents/GitHub/circuits-2019/EAGLE Supporting Files/Bitmaps for logos/HyTech_square.bmp